# Altium PCB 安抚版大号发球机 1.6mm 双面板.PcbDoc (part 1 of 3)
Units mil, origin at the board's own origin, x right, y up, seen from the top; angles counter-clockwise.
Board outline 2637.8 x 5118.11 mil, 2 copper layers (Top Layer, Bottom Layer); 155 components, 97 nets, 435 pads, 221 vias.
Unrouted connection lines stored in the file: 1.
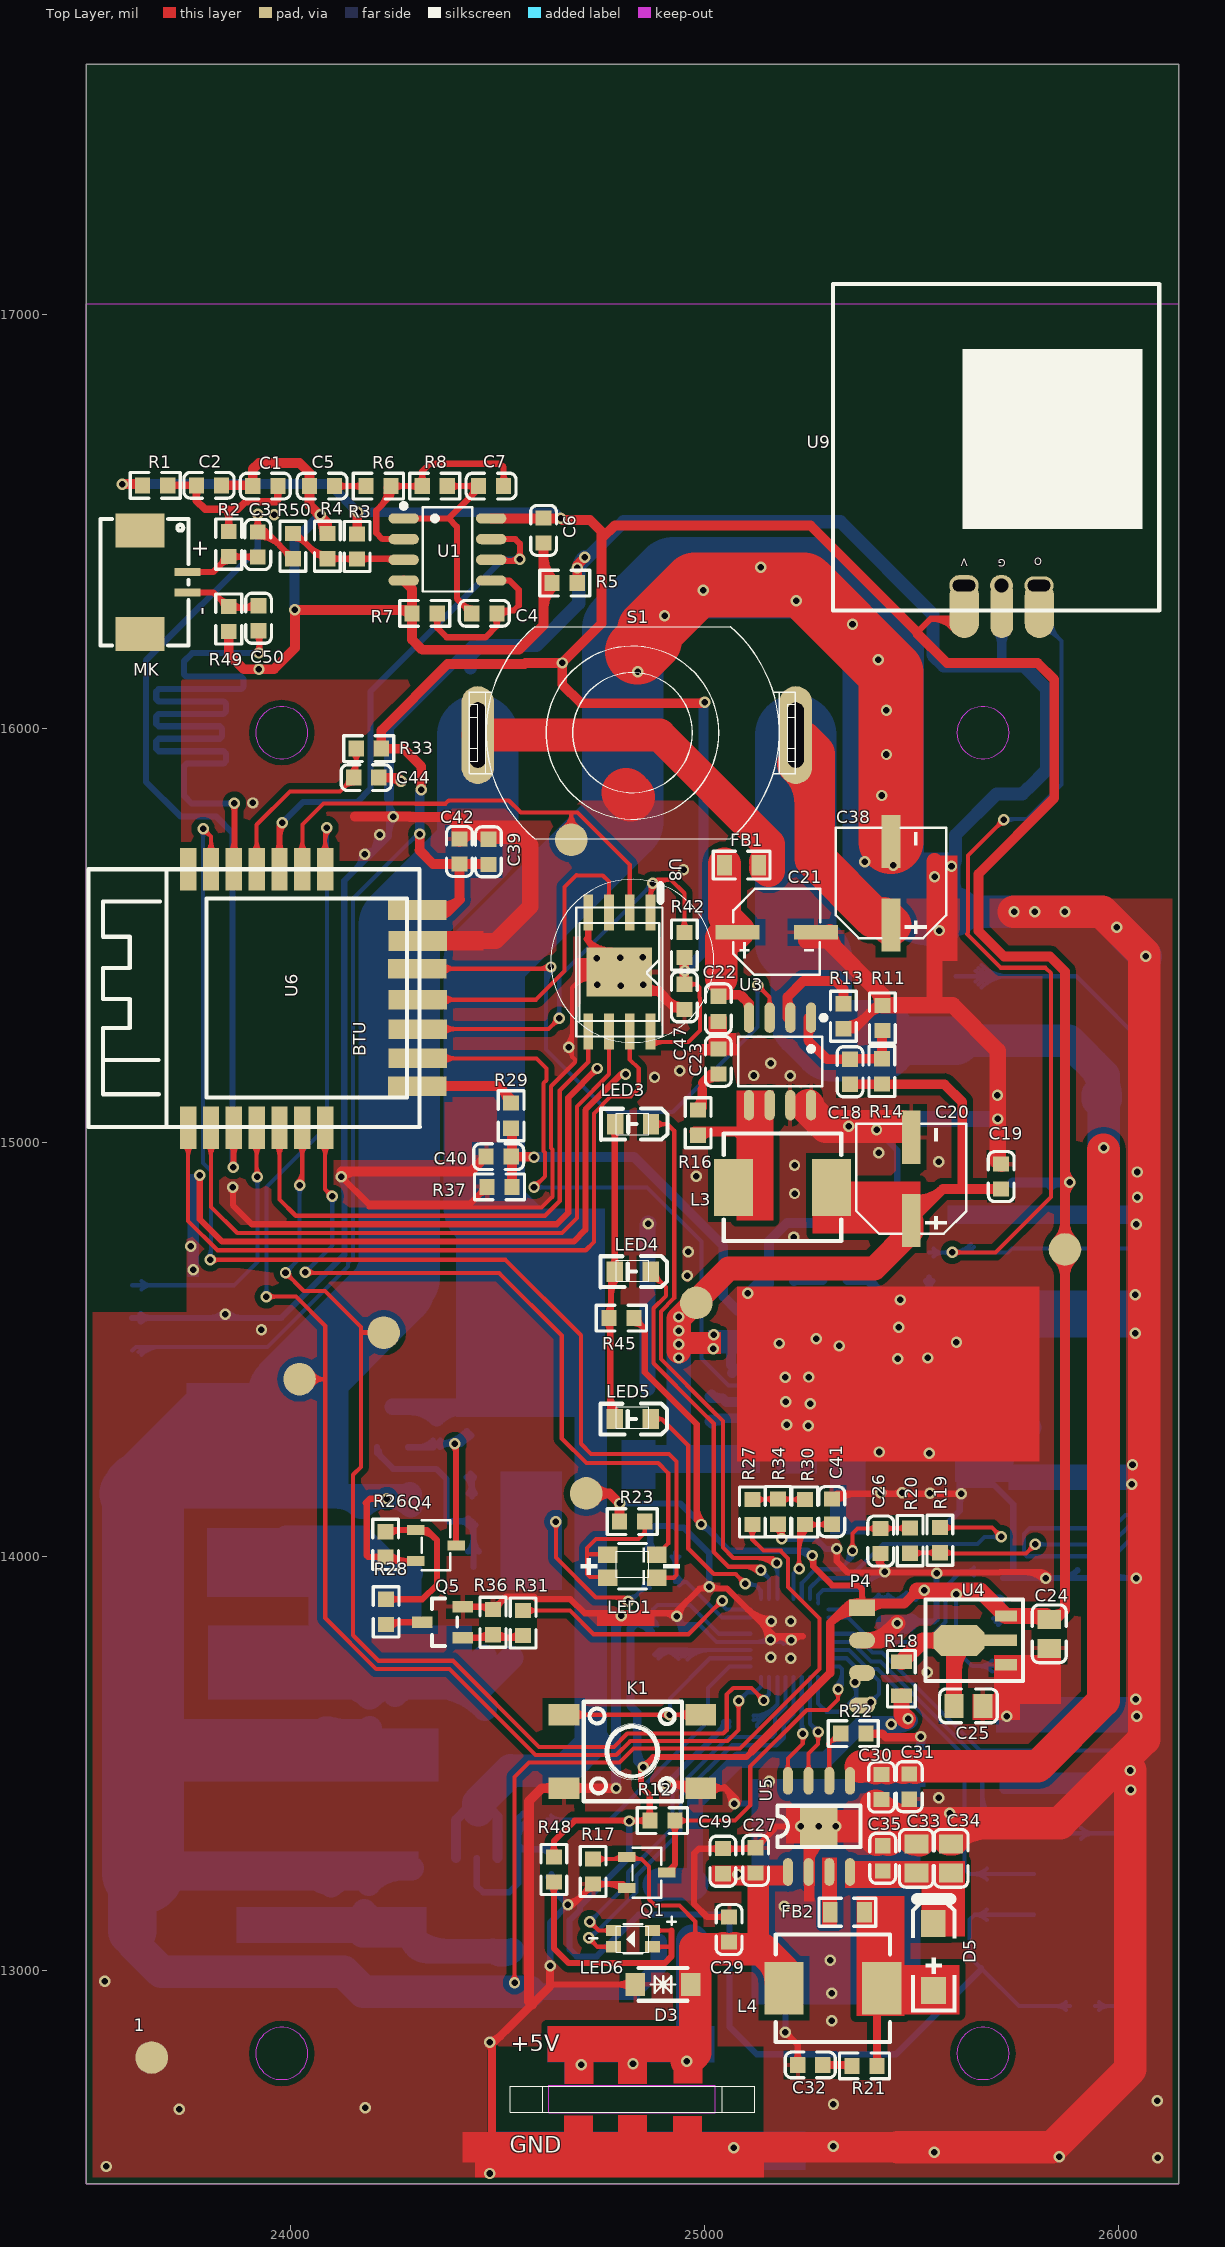
[diagram p0: Top Layer view]
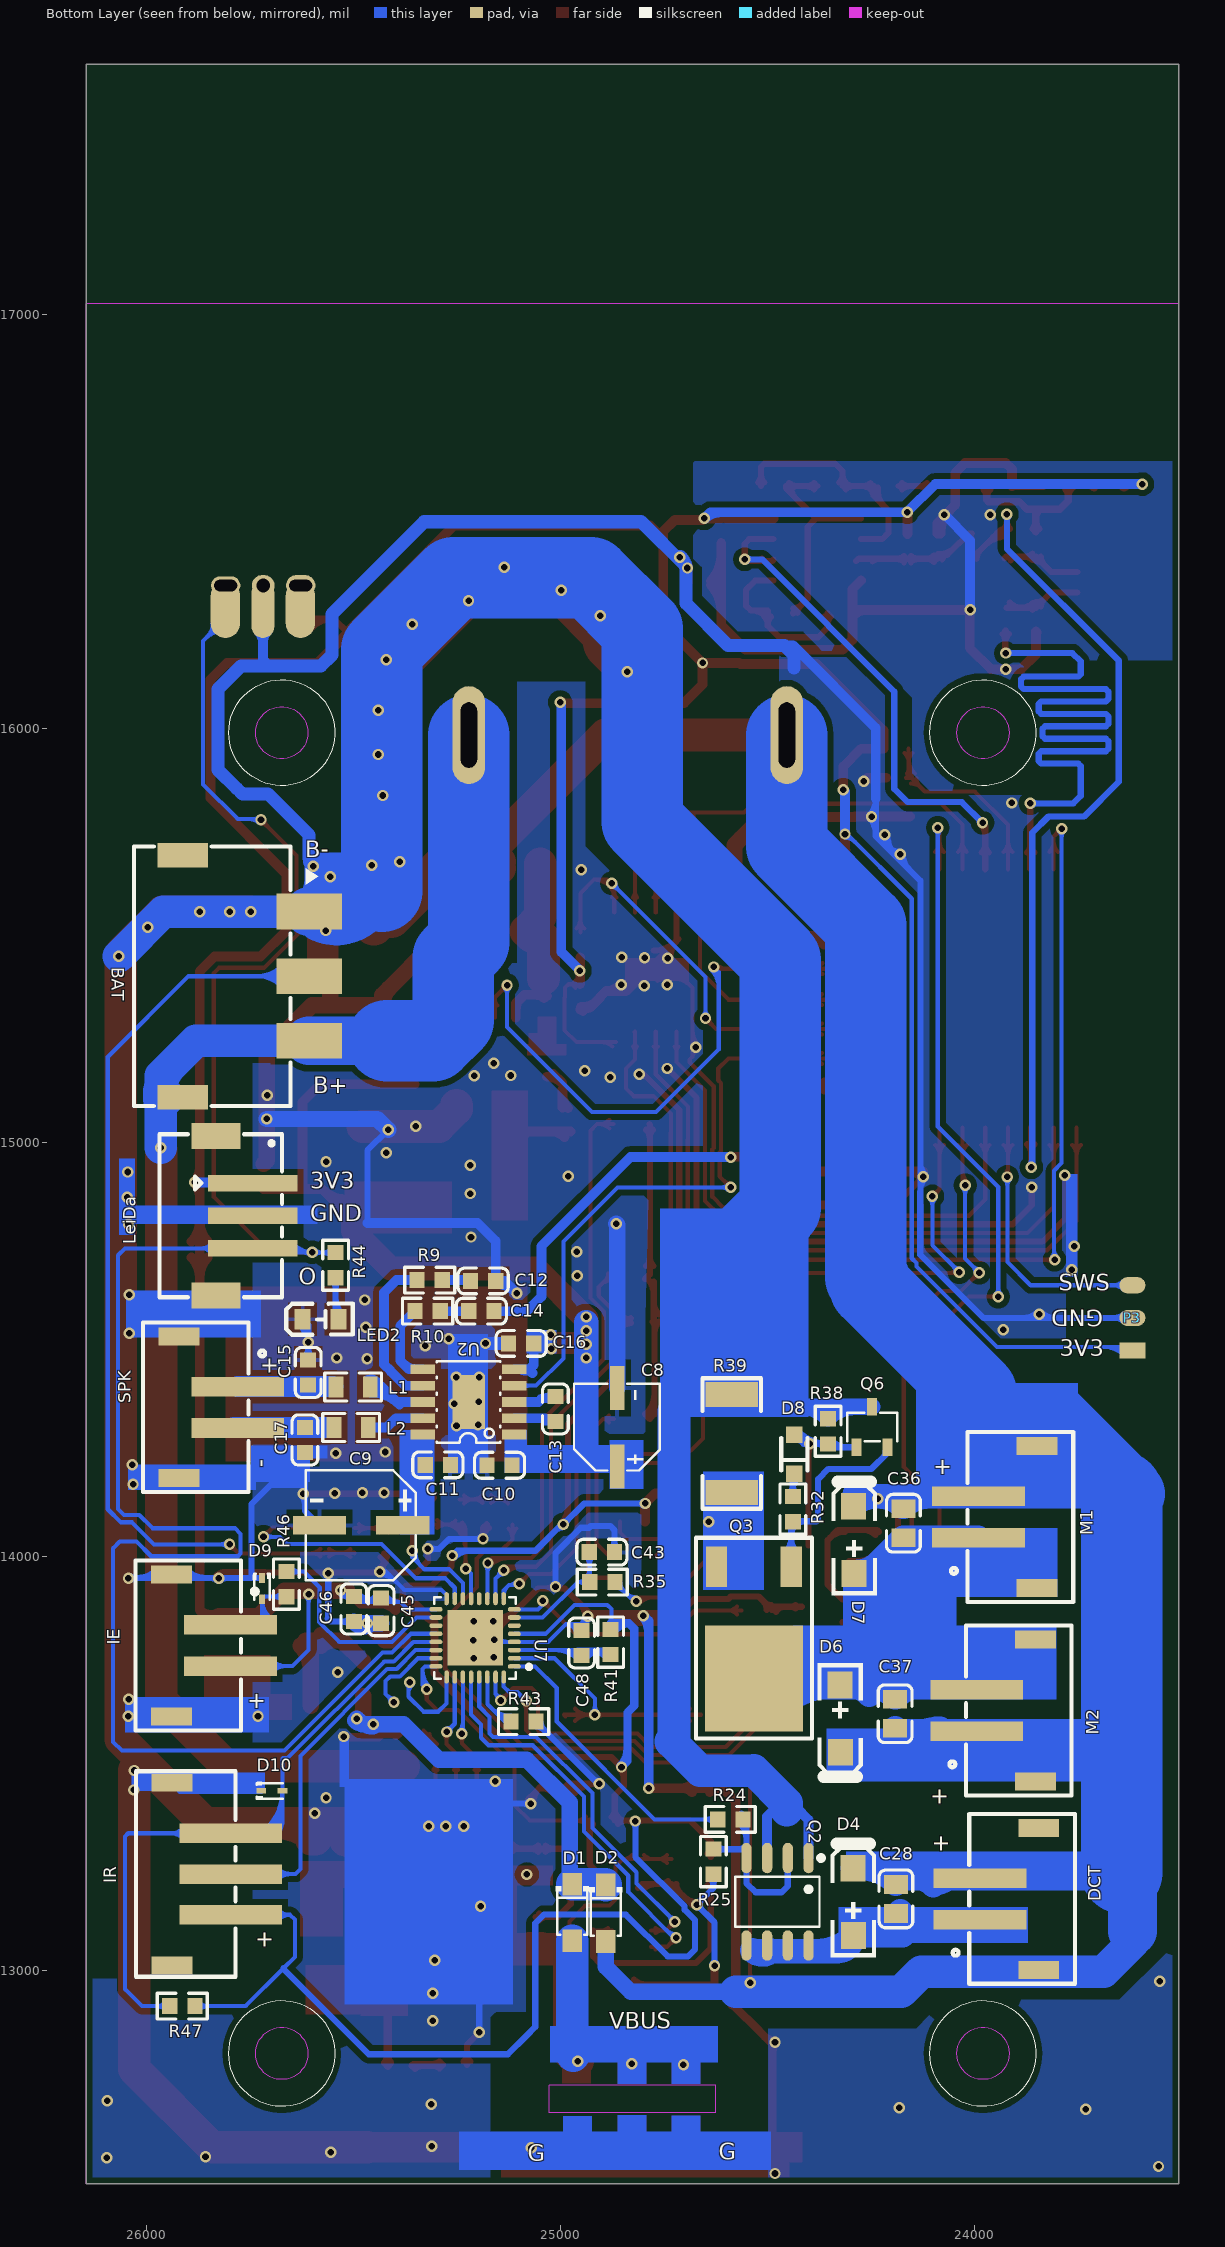
[diagram p1: Bottom Layer view, seen from below]
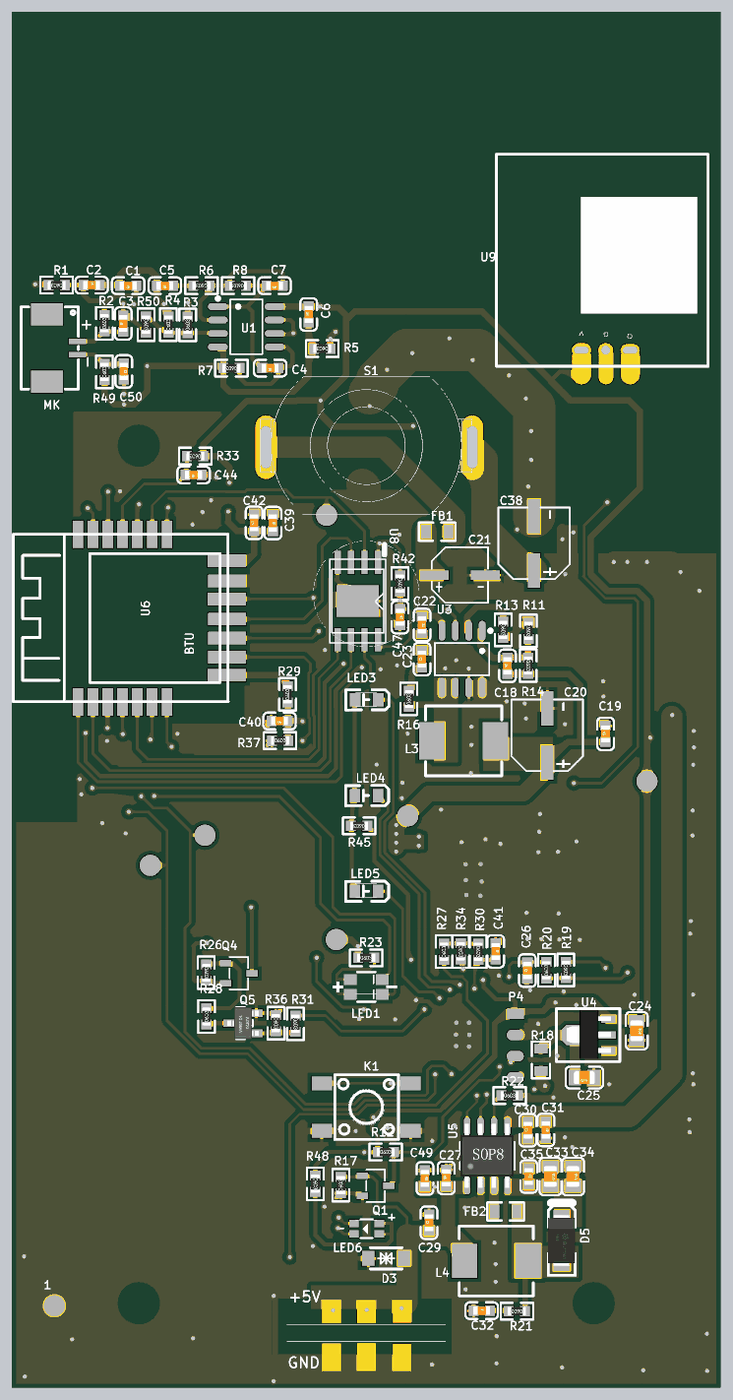
[diagram p4: 3D render of the assembled board from above, using the file's embedded part models]
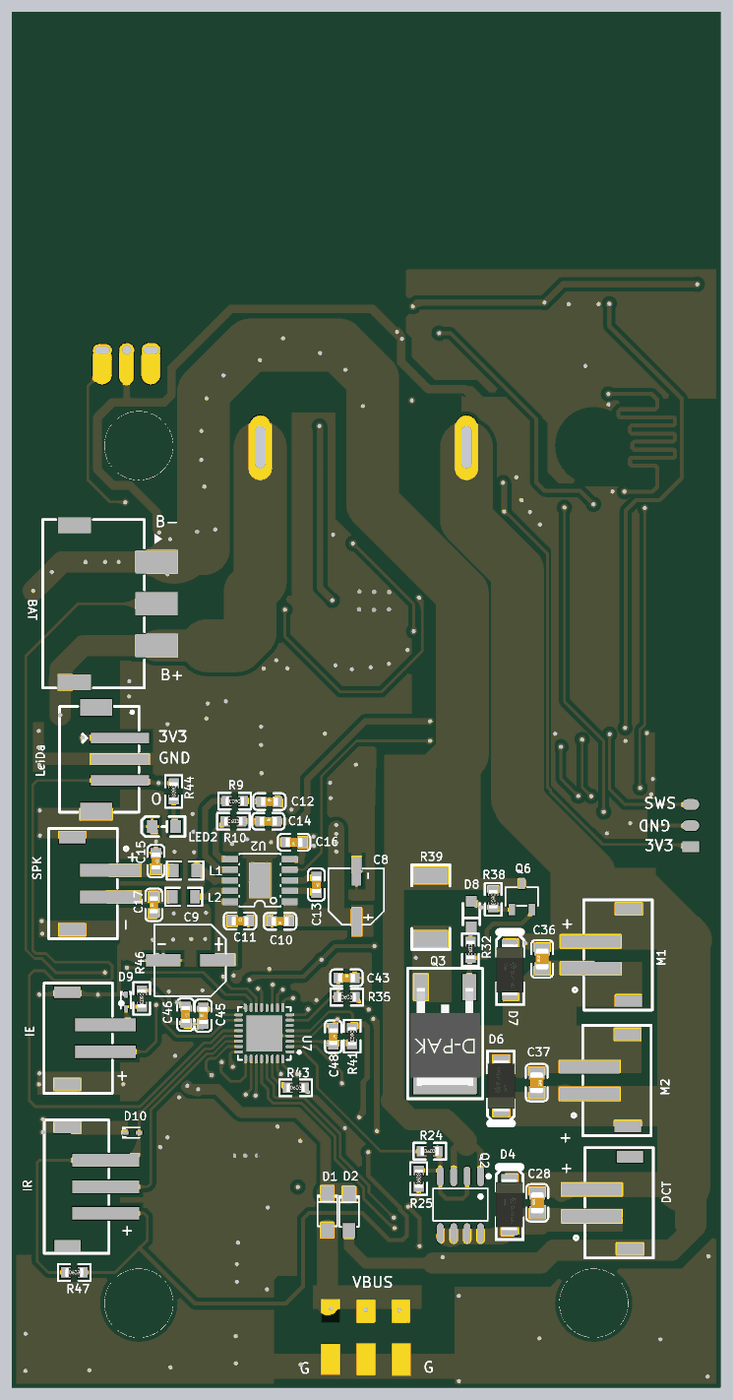
[diagram p5: 3D render of the assembled board from below, using the file's embedded part models]

## Layer stack, top to bottom
Top Solder: solder mask 0.4, Solder Resist, Dk 3.5
Top Layer: signal copper 1.4
Dielectric1: dielectric 12.6, FR-4, Dk 4.8
Bottom Layer: signal copper 1.4
Bottom Solder: solder mask 0.4, Solder Resist, Dk 3.5

## Board outline
23507.54,12485.84 23507.54,17603.96 26145.34,17603.96 26145.34,12485.84

## Design rules (kind name [scope] priority, off if disabled: settings)
Clearance [All] p1: gap=7.8 ignorepadtopadclearanceinfootprint=FALSE except(0: Arc-Hole Track-Hole SMDPad-Hole THPad-Hole Via-Hole Fill-Hole Poly-Hole Region-Hole Text-Hole)
ComponentClearance [All] p1: gap=0 collisioncheckmode=3 verticalgap=0 showdistances=FALSE
DiffPairsRouting [All] p1: maxlimit=10 minlimit=10 mostfreqgap=10 toplayer_minwidth=15 toplayer_maxwidth=15 toplayer_prefwidth=15 bottomlayer_minwidth=15 bottomlayer_maxwidth=15 bottomlayer_prefwidth=15 maxuncoupledlength=500
FabricationTestPointUsage TestPointUsage [All] p1: valid=0 allowmultiple=FALSE
FabricationTestpoint Testpoint [(IsPad And (OnTopLayer Or OnBottomLayer))] p1: side=3 testpointundercomponent=TRUE minsize=40 maxsize=100 preferedsize=60 minholesize=0 maxholesize=40 preferedholesize=32 testpointgrid=1 allowsidetop=TRUE allowsidebottom=TRUE usegrid=TRUE gridtolerance=0.01
MinimumSolderMaskSliver [All] p1: minsoldermaskwidth=4
PolygonConnect PolygonConnect_1 [All vs IsVia] p1: connectstyle=Direct reliefconductorwidth=10 reliefentries=4 polygonreliefangle="90 Angle" airgapwidth=10
PolygonConnect [All] p2: connectstyle=Relief reliefconductorwidth=10 reliefentries=4 polygonreliefangle="90 Angle" airgapwidth=10
RoutingVias [All] p1: holewidth=28 width=50 viastyle="Through Hole" minholewidth=28 minwidth=50 maxholewidth=28 maxwidth=50
SilkToSilkClearance [All] p1: silktosilkclearance=0
SilkToSolderMaskClearance SilkscreenOverComponentPads [IsPad] p1: minsilkscreentomaskgap=0 clearancetoexposedcopper=TRUE
SolderMaskExpansion [All] p1: expansion=4
Width [All] p1: maxlimit=400 minlimit=7.8 preferedwidth=10 minimp=50.000000 maximp=50.000000 favimp=50.000000
23 further rules are at their usual default settings.

## Classes and differential pairs
net class MIC: MIC_N MIC_P
component class AUDIO: C1 C2 C3 C4 C5 C6 C7 C8 C9 C10 C11 C12 C13 C14 C15 C16 C17 C50 CN1 CON1 L1 L2 MK MK1 R1 R2 R3 R4 R5 R6 R7 R8 R9 R10 R49 R50 SPK U1 U2
component class Power: BAT C18 C19 C20 C21 C22 C23 C24 C25 C26 D1 D2 D3 FB1 J1 L3 P1 P2 Q1 R11 R12 R13 R14 R16 R17 R18 R19 R20 S1 U3 U4
component class 大号发球机: *1 C23 C30 C31 C32 C33 C34 C35 C41 C42 C43 C44 C45 C46 C47 C48 D2 D5 D6 D7 D8 D9 D10 IE IR J2 J3 K1 LED1 LED2 LED3 LED4 LED5 M1 M2 MA1 MB1 MB2 P3 P4 Q2 Q3 Q4 Q5 Q6 Q7 R21 R22 R23 R24 R25 R26 R27 R28 R29 R30 R31 R32 R33 R34 R35 R36 R37 R38 R39 R41 R42 R43 R44 R45 R46 R47 R48 U5 U6 U7 U8
differential pair MIC: +MIC_P -MIC_N

## Components (designator, comment, footprint, x,y, rotation, side; value= is the part's Value field where it differs from the comment)
1 "" TP#1 23666,12791 r0 top (schematic designator TP3)
BAT "3.96-3P LT" CONN-SMD_3.96-3P-LT 25774,15387 r270 bottom (schematic designator J1)
C1 "22uf/10V" 0603_C 23940.31,16585 r180 top
C2 "100nf 16v" 0603_C 23804.31,16587 r0 top
C3 "10uf/10V" 0603_C 23922,16444 r90 top
C4 "1uf/10V" 0603_C 24469,16278 r180 top
C5 "10uf/10V" 0603_C 24077.31,16585 r180 top
C6 "100nf 16v" 0603_C 24612,16478 r90 top
C7 "51PF/16v" 0603_C 24485.31,16585 r180 top
C8 "100uf 16V" CAP-SMD_5*5.4 24863,14313 r90 bottom
C9 "220uf/10v" "SMD 6.3*7.7" 25481,14081 r180 bottom
C10 "10uf/10V" 0603_C 25147,14221 r0 bottom
C11 "10uf/10V" 0603_C 25296,14222 r180 bottom
C12 "100nf" 0603_C 25186.69,14666 r180 bottom
C13 "4.7uf/10V" 0603_C 25012,14357 r270 bottom
C14 "100nf" 0603_C 25191,14593 r180 bottom
C15 "1nF" 0603_c 25609,14445 r270 bottom
C16 "1uf/10V" 0603_C 25095,14515 r0 bottom
C17 "1nF" 0603_c 25617,14282 r90 bottom
C18 "1nf 16v" 0603_C 25352,15171 r90 top (schematic designator C24)
C19 "100nf 16v" 0603_C 25717,14918 r90 top (schematic designator C25)
C20 "220uf/10v" "SMD 6.3*7.7" 25505,14912 r270 top (schematic designator C26)
C21 "100uf/16v 5X5.4" CAP-SMD_5*5.4 25175,15508 r0 top
C22 "100nf 16v" 0603_C 25034,15323 r270 top
C23 "2.2nf 16v" 0603_c 25034,15196 r90 top (schematic designator C29)
C24 "1nf 16v" 0805_C 25833,13814 r270 top
C25 "22UF" 0805_C 25638,13640 r180 top
C26 "100nF" 0603_C 25426,14038 r90 top
C27 "1UF 25V" 0603_C 25124,13267 r90 top (schematic designator C28)
C28 "0.1uf/25v" 0805_C 24190,13174 r90 bottom
C29 "10UF" 0603_c 25060,13100 r90 top
C30 "1UF 16V" 0603_c 25428,13444 r90 top
C31 "10UF 16V" 0603_c 25495,13445 r270 top (schematic designator C36)
C32 "1000P" 0603_C 25256,12773 r0 top (schematic designator C37)
C33 "22UF 25V" 0805_C 25512,13272 r270 top (schematic designator C38)
C34 "22UF 25V" 0805_C 25596,13272 r270 top (schematic designator C39)
C35 "1UF 25V" 0603_C 25431,13272 r270 top (schematic designator C40)
C36 "0.1uf/25v" 0805_C 24172,14081 r90 bottom
C37 "0.1uf/25v" 0805_C 24192,13621 r270 bottom
C38 "220uf/25v" "SMD 6.3*7.7" 25456,15626 r270 top
C39 "10uf" 0603_c 24479,15702 r270 top
C40 "1nF" 0603_C 24503.68,14966 r180 top
C41 "100nF" 0603_C 25308,14109 r270 top
C42 "0.1uf/25v" 0603_C 24409,15703 r90 top
C43 "100NF/50V" 0603_C 24900,14011 r180 bottom
C44 "100nF" 0603_C 24184,15881 r180 top
C45 "10uf" 0603_c 25433,13870 r90 bottom
C46 "0.1uf/25v" 0603_C 25499,13874 r270 bottom
C47 "0.1uf/25v" 0603_C 24952,15352 r270 top
C48 "100nF" 0603_C 24949,13792 r270 bottom
C49 "10UF 25V" 0603_c 25045,13265 r270 top
C50 "10uf/10V" 0603_C 23924,16266 r270 top
D1 "DSK24" SOD-123FL 24965,13135 r270 bottom
D2 "DSK24" SOD-123FL 24884,13133 r270 bottom
D3 "SMF6.0CA" "SOD-123 双向" 24907,12965 r0 top (schematic designator D4)
D4 "SS24" SMA 24290,13143 r270 bottom
D5 "SS54" SMA 25557,13010 r270 top (schematic designator D6)
D6 "SS54" SMA 24328,13633 r90 bottom
D7 "SS54" SMA 24288,14017 r270 bottom
D8 "1N5819WS" SOD-323 24484,14231 r90 bottom
D9 "LESD5Z5.0CT1G" SOD-523_L1.2-W0.8-LS1.6-RD 25721,13923 r270 bottom
D10 "LESD5Z5.0CT1G" SOD-523_L1.2-W0.8-LS1.6-RD 25697,13435 r180 bottom
DCT "2.54-2P LT" CONN-SMD_2.54-2PLT 23916,13174 r90 bottom (schematic designator MB1)
FB1 "100R/100M" 0805_R 25101,15669 r180 top
FB2 "100R/100M" 0805_R 25356,13141 r180 top
IE "2.54-2P LT" CONN-SMD_2.54-2PLT 25868,13786 r270 bottom (schematic designator J3)
IR "2.54-3P LT" CONN-SMD_2.54-3P-LT 25867,13234 r270 bottom (schematic designator J4)
K1 "C42416254" KEY_SMD_4P 24828,13530 r180 top
L1 "1K 0.5A" 0805_R 25511,14411 r180 bottom
L2 "1K 0.5A" 0805_R 25516,14313 r180 bottom
L3 "33uh 0650" IND-SMD_L7.7-W6.6_APS0650 25189,14892 r0 top
L4 "0630-2R2" "L 6.6*7.0" 25314,12961 r0 top
LED1 "bl-hb5gk33b-trb" LED-SMD_4P-L3.2-W2.7-P1.40-TL_BL-HB5GK33B-TRB 24825,13981 r0 top
LED2 "LED_LeiDa" 0805_LED 25555,14569 r180 bottom
LED3 "C7371911" 0805_LED 24804,15049 r180 top
LED4 "C7371911" 0805_LED 24803,14693 r180 top
LED5 "C7371911" 0805_LED 24803,14337 r180 top
LED6 "C5221230" LED-SMD_4P-L3.2-W1.6-TL_XL-3216SURUGC 24828,13078 r0 top
LeiDa "2.0-3P LT" CONN-SMD_2.0-3PLT 25846,14770 r90 bottom (schematic designator J2)
M1 "2.54-2P LT" CONN-SMD_2.54-2PLT 23920,14096 r90 bottom (schematic designator MA1)
M2 "2.54-2P LT" CONN-SMD_2.54-2PLT 23924,13629 r90 bottom (schematic designator MA2)
MK "" CONN-SMD_1.25-2PWT 23695,16353 r90 top (schematic designator MK1)
P3 "" "4P 2.0"#1 23616,14611 r270 bottom
P4 "" "4P 2.0"#2 25378,13764 r90 top
Q1 "2N7002" SOT-23 24841,13229 r180 top
Q2 "AP9926" SOP8 24476,13167 r0 bottom
Q3 "SM3113NSUC-VB" TO-252 24533,13841 r90 bottom
Q4 "S8550" SOT-23 24332,14019 r180 top
Q5 "S8050" SOT-23(SOT-23-3) 24368,13842 r0 top
Q6 "S8550" SOT-23 24239,14293 r270 bottom
R1 "10R" 0603_R 23674.31,16587 r180 top
R2 "2.2k" 0603_R 23852,16445 r90 top
R3 "56k" 0603_R 24162,16439 r90 top
R4 "56k" 0603_R 24090,16440 r90 top
R5 "0R" 0603_R 24663,16351 r180 top
R6 "100R" 0603_R 24213.31,16585 r180 top
R7 "13k" 0603_R 24325,16278 r180 top
R8 "2.7K" 0603_R 24349.31,16585 r180 top
R9 "27K" 0603_R 25315.69,14668 r0 bottom
R10 "27K" 0603_R 25320.69,14593 r180 bottom
R11 "32.4k" 0603_R 25430,15301 r270 top
R12 "10k" 0603_R 24899,13363 r0 top
R13 "NC/30k" 0603_R 25336,15305 r270 top (schematic designator R18)
R14 "100k" 0603_r 25429,15172 r270 top
R16 "2R" 0603_R 24985,15048 r90 top
R17 "100k" 0603_r 24732,13240 r90 top
R18 "2R" 0805_R 25477,13716 r270 top
R19 "5.1K" 0603_R 25569,14040 r270 top
R20 "1K" 0603_R 25497,14039 r90 top
R21 "1K" 0603_R 25387,12771 r180 top
R22 "1K" 0603_R 25360,13573 r0 top
R23 "1K" 0603_R 24826,14085 r0 top
R24 "10R" 0603_R 24590,13366 r180 bottom
R25 "10K" 0603_R 24631,13264 r90 bottom
R26 "10k" 0603_R 24231,14030 r270 top
R27 "470K" 0603_R 25116,14108 r90 top
R28 "1k" 0603_R 24232,13867 r90 top
R29 "0R" 0603_R 24533.68,15065 r90 top
R30 "10K" 0603_R 25243,14108 r270 top
R31 "1k" 0603_R 24563,13840 r270 top
R32 "51R" 0603_R 24439,14115 r90 bottom
R33 "10K" 0603_R 24190,15951 r180 top
R34 "100K" 0603_R 25178,14109 r270 top
R35 "1K" 0603_R 24899,13939 r180 bottom
R36 "10k" 0603_R 24490,13842 r270 top
R37 "10K" 0603_R 24505.68,14893 r0 top
R38 "1K" 0603_R 24354,14303 r270 bottom
R39 "R010" 2512_R 24551,14267 r180 bottom
R41 "100k" 0603_R 24879,13794 r270 bottom
R42 "10K" 0603_R 24952,15477 r270 top
R43 "10k" 0603_R 25089,13602 r180 bottom
R44 "10K" 0603_R 25543,14704 r270 bottom
R45 "1k" 0603_r 24800,14576 r180 top
R46 "3.3K" 0603_R 25662,13934 r270 bottom
R47 "10K" 0603_R 25913,12915 r180 bottom
R48 "1K" 0603_R 24637,13245 r270 top
R49 "2.2k" 0603_R 23852,16264 r90 top
R50 "10R" 0603_R 24007,16440 r270 top
S1 "*" 大按键 24690,16049 r180 top
SPK "2.54-2P LT" CONN-SMD_2.54-2PLT 25850,14361 r270 bottom (schematic designator CON1)
TP1 "" TP#2 24679,15731 r0 top
TP2 "" TP#2 24715,14153 r0 top
TP3 "" TP#2 24023,14429 r0 top
TP4 "" TP#2 24226,14541 r0 top
TP4 "" TP#2 24981,14613 r0 top
TP4 "" TP#2 25871,14742 r0 top
U1 "lmv358b-sr" SOP8 24380,16432 r270 top
U2 "CST8336" ESOP-10 25239,14465 r90 bottom
U3 "tmi3493" SOP8 25183,15196 r180 top (schematic designator U4)
U4 "me6210a30pg" SOT-89 25483,13812 r0 top
U5 "HE5090EA" SOP8-9 25277,13349 r0 top
U6 "BTU" BTU 24458,15034 r90 top locked
U7 "PY32F040K1BU6" QFN-32_L5.0-W5.0-P0.50-BL-EP3.4 25201,13816 r90 bottom
U8 "W25NO1GVZE1G" SOP8-150+208 24795,15412 r270 top
U9 "LeiDa" 5.8G 25815,16649 r180 top

## Footprints (in the part's own frame and the unit in brackets; to place one, negate y for a bottom-side part, rotate by r counter-clockwise, add the part's x,y. Pads: shape width x height; smd on the part's side, far side on the other; paste and mask are expansions set on the pad)
"4P 2.0"#1 [mm]
  rect 1x1.6 smd: 1(2.87,-0.076)
  oval 1x1.6 smd: 2(0.87,-0.076) 3(-1.13,-0.076)
"4P 2.0"#2 [mm]
  rect 1x1.6 smd: 1(2.87,-0.076)
  oval 1x1.6 smd: 2(0.87,-0.076) 3(-1.13,-0.076) 4(-3.13,-0.076)
5.8G [mm]
  oval 1.8x3.5 all layers, no hole: 1(4.752,9.195) 3(0.152,9.195)
  oval 1.8x1.3 hole 0.7 slot 1.4 at 0 deg: 1(4.771,7.722)
  oval 1.4x3.5 all layers, no hole: 2(2.452,9.195)
  oval 1.4x1.3 hole 0.85: 2(2.471,7.722)
  oval 1.8x1.118 hole 0.7 slot 1.4 at 0 deg: 3(0.171,7.722)
  silkscreen extent -7.21,-10.77 12.81,9.25, body extent 0.2,7.47 4.72,9.44, height 5.5
0603_C [mm]
  rect 0.93x0.98 smd: 1(-0.77,0) 2(0.77,0)
  silkscreen extent -1.54,-0.79 1.54,0.79, body extent -0.8,-0.4 0.8,0.4, height 0.3
0603_c [mm]
  rect 0.93x0.98 smd: 1(-0.77,0) 2(0.77,0)
  silkscreen extent -1.54,-0.79 1.54,0.79, body extent -0.8,-0.4 0.8,0.4, height 0.3
0603_R [mm]
  rect 0.93x0.98 smd: 1(-0.77,0) 2(0.77,0)
  silkscreen extent -1.53,-0.79 1.54,0.79, body extent -0.85,-0.4 0.85,0.4, height 0.56
0603_r [mm]
  rect 0.93x0.98 smd: 1(-0.77,0) 2(0.77,0)
  silkscreen extent -1.53,-0.79 1.54,0.79, body extent -0.85,-0.4 0.85,0.4, height 0.56
0805_C [mm]
  rect 1.16x1.47 smd: 1(-0.89,0) 2(0.89,0)
  silkscreen extent -1.77,-1.04 1.77,1.04, body extent -1,-0.62 1,0.63, height 0.77
0805_LED [mm]
  rect 1x1.25 smd: 1(0.482,0.112) 2(-1.718,0.112)
  silkscreen extent -2.72,-0.84 1.36,1.07
0805_R [mm]
  rect 0.9x1.27 smd: 1(1.318,-0.024) 2(-0.782,-0.024)
  silkscreen extent -1.47,-0.88 2,0.83
2512_R [mil]
  rect 125.98x60 smd: 1(-35.33,124.72) 2(-35.33,-111.5)
  silkscreen extent -106,-151 36,164
BTU [mm]
  rect 2.6x1 smd: 1(0.051,17.882) 2(0.051,16.482) 3(0.051,15.082) 4(0.049,13.68) 5(0.051,12.282) 6(0.051,10.882) 7(0.051,9.482) 15(15.9,9.48) 16(15.9,10.88) 17(15.9,12.28) 18(15.9,13.68) 19(15.9,15.08) 20(15.9,16.48) 21(15.9,17.88)
  rect 1.2x3.6 smd: 8(2.602,3.834) 9(4.3,3.8) 10(6.1,3.8) 11(7.9,3.8) 12(9.802,3.834) 13(11.5,3.8) 14(13.402,3.834)
  silkscreen extent 0.1,3.68 15.9,24
CAP-SMD_5*5.4 [mm]
  rect 2.7x0.91 smd: 1(-2.4,0) 2(2.4,0)
  silkscreen extent -2.66,-2.62 2.66,2.65
CONN-SMD_1.25-2PWT [mm]
  rect 0.5x1.6 smd: 1(0.625,-1.45) 2(-0.625,-1.45)
  rect 2.1x3 smd: 3(3.175,1.45) 4(-3.175,1.45)
  silkscreen extent -3.87,-1.52 3.88,3.88
CONN-SMD_2.0-3PLT [mm]
  rect 1x5.5 smd: 1(3.357,-2.609) 2(1.357,-2.609) 3(-0.643,-2.609)
  rect 1.6x3 smd: 4(-3.543,-0.359) 5(6.256,-0.359)
  silkscreen extent -3.64,-4.41 6.36,3.09
CONN-SMD_2.54-2PLT [mm]
  rect 1.2x5.7 smd: 1(-1.27,1.8) 2(1.27,1.8)
  rect 1.1x2.5 smd: 3(-4.35,-1.8) 4(4.35,-1.8)
  silkscreen extent -5.21,-4.01 5.21,3.48
CONN-SMD_2.54-3P-LT [mm]
  rect 1.2x6.3 smd: 1(-2.5,1.8) 2(0,1.8) 3(2.5,1.8)
  rect 1.1x2.5 smd: 4(5.6,-1.8) 5(-5.6,-1.8)
  silkscreen extent -6.3,-4 6.3,2.1
CONN-SMD_3.96-3P-LT [mm]
  rect 2.2x4 smd paste+0 mask+0.05: 1(-4.334,4.248) 2(-0.374,4.248) 3(3.586,4.248)
  rect 1.5x3.1 smd paste+0 mask+0.05: 4(7.035,-3.502) 5(-7.784,-3.502)
  silkscreen extent -8.32,-6.5 7.58,4.79
ESOP-10 [mm]
  rect 0.6x1.5 smd paste+0 mask+0.05: 1(-4.316,-3.238) 2(-3.316,-3.238) 3(-2.316,-3.238) 4(-1.316,-3.238) 5(-0.316,-3.238) 6(-0.316,2.362) 7(-1.316,2.362) 8(-2.316,2.362) 9(-3.316,2.362) 10(-4.316,2.362)
  rect 3.3x2 smd paste+0 mask+0.05: 11(-2.316,-0.438)
  silkscreen extent -4.82,-2.39 0.18,1.51
IND-SMD_L7.7-W6.6_APS0650 [mm]
  rect 2.4x3.5 smd: 1(-3,0) 2(3,0)
  silkscreen extent -3.6,-3.3 3.6,3.3
KEY_SMD_4P [mm]
  rect 1.9x1.3 smd: 1(-4.155,2.252) 2(4.244,2.252) 3(-4.155,-2.247) 4(4.244,-2.247)
  silkscreen extent -3.01,-3.05 3.02,3.05
"L 6.6*7.0" [mm]
  rect 2.4x3.2 smd: 1(-3.093,-0.069) 2(2.907,-0.069)
  silkscreen extent -3.59,-3.37 3.41,3.23
LED-SMD_4P-L3.2-W1.6-TL_XL-3216SURUGC [mm]
  rect 0.9x0.7 smd: 1(-1.2,0.5) 2(1.2,0.5) 3(-1.2,-0.5) 4(1.2,-0.5)
  silkscreen extent -2.69,-0.89 2.61,1.35
LED-SMD_4P-L3.2-W2.7-P1.40-TL_BL-HB5GK33B-TRB [mm]
  rect 1.2x1 smd paste+0 mask+0.05: 1(1.54,-0.802) 2(1.54,0.598) 3(-1.46,-0.802) 4(-1.46,0.598)
  silkscreen extent -3.14,-1.5 2.95,1.3
QFN-32_L5.0-W5.0-P0.50-BL-EP3.4 [mm]
  oval 0.28x0.8 smd paste+0 mask+0.05: 1(-2.049,-2.273) 2(-1.549,-2.273) 3(-1.049,-2.273) 4(-0.549,-2.273) 5(-0.049,-2.273) 6(0.451,-2.273) 7(0.951,-2.273) 8(1.451,-2.273) 17(1.451,2.527) 18(0.951,2.527) 19(0.451,2.527) 20(-0.049,2.527) 21(-0.549,2.527) 22(-1.049,2.527) 23(-1.549,2.527) 24(-2.049,2.527)
  oval 0.8x0.28 smd paste+0 mask+0.05: 9(2.101,-1.623) 10(2.101,-1.123) 11(2.101,-0.623) 12(2.101,-0.123) 13(2.101,0.377) 14(2.101,0.877) 15(2.101,1.377) 16(2.101,1.877) 25(-2.699,1.877) 26(-2.699,1.377) 27(-2.699,0.877) 28(-2.699,0.377) 29(-2.699,-0.123) 30(-2.699,-0.623) 31(-2.699,-1.123) 32(-2.699,-1.623)
  rect 3.4x3.4 smd paste+0 mask+0.05: 33(-0.299,0.127)
  silkscreen extent -2.8,-3.3 2.2,2.63
SMA [mm]
  rect 1.65x1.53 smd: 1(1.449,-0.076) 2(-2.665,-0.102)
  silkscreen extent -4.16,-1.47 2.8,1.32, body extent -3.06,-1.39 1.84,1.18, height 2.39
"SMD 6.3*7.7" [mm]
  rect 3.26x1.15 smd: 1(2.549,-0.129) 2(-2.561,-0.129)
  silkscreen extent -3.4,-3.51 3.36,3.25
"SOD-123 双向" [mm]
  rect 1.2x1.4 smd: 1(-1.864,0.06) 2(1.536,0.06)
  silkscreen extent -1.66,-0.94 1.34,1.06
SOD-123FL [mm]
  rect 1.4x1.2 smd: 1(1.579,-0.166) 2(-1.891,-0.166)
  silkscreen extent -1.76,-1.17 1.22,0.84
SOD-323 [mm]
  rect 1x1 smd: 1(1.625,-1.235) 2(-0.774,-1.235)
  silkscreen extent -0.57,-2.03 1.43,-0.44
SOD-523_L1.2-W0.8-LS1.6-RD [mm]
  rect 0.6x0.36 smd: 1(-0.65,0) 2(0.65,0)
  silkscreen extent -0.91,-0.55 0.68,0.55
SOP8 [mm]
  oval 0.63x1.865 smd: 1(-1.905,-2.682) 2(-0.635,-2.682) 3(0.635,-2.682) 4(1.905,-2.682) 5(1.905,2.682) 6(0.635,2.682) 7(-0.635,2.682) 8(-1.905,2.682)
  silkscreen extent -2.82,-2.83 2.58,1.52
SOP8-9 [mil]
  oval 24x66.93 smd: 1(-75,-110) 2(-25,-110) 3(25,-110) 4(75,-110) 5(75,110) 6(25,110) 7(-25,110) 8(-75,110)
  rect 90.55x90.55 smd: 9(0,0)
  silkscreen extent -100,-50 100,50, body extent -100,-119 98,119, height 63
SOP8-150+208 [mm]
  rect 2.2x0.6 smd: 1(-3.65,1.905) 2(-3.65,0.635) 3(-3.65,-0.635) 4(-3.65,-1.905) 5(3.65,-1.905) 6(3.65,-0.635) 7(3.65,0.635) 8(3.65,1.905)
  rect 3x4 smd: 9(0,0)
  silkscreen extent -5.32,-2.64 3.95,2.64
SOT-23 [mm]
  rect 1.07x0.6 smd: 1(0.719,-1.166) 2(0.719,0.734) 3(-1.751,-0.216)
  silkscreen extent -1.39,-1.75 0.36,1.32
SOT-23(SOT-23-3) [mm]
  rect 1.25x0.7 smd: 1(1.25,-0.95) 2(1.25,0.95) 3(-1.25,0)
  silkscreen extent -0.65,-1.46 0.9,1.46, body extent -1.5,-1.5 1.5,1.5, height 1.3
SOT-89 [mm]
  rect 1.35x0.7 smd: 1(6.223,-1.854) 3(6.223,1.146)
  oct 3.15x1.9 smd: 2(3.358,-0.354)
  rect 2.2x0.7 smd: 2(5.817,-0.356)
  silkscreen extent 1.29,-2.85 7.29,2.15, body extent 2.28,-2.62 6.48,1.98, height 1.55
TO-252 [mm]
  rect 2.5x1.3 smd: 1(3.429,-2.286) 3(3.429,2.286)
  rect 6.5x6 smd: 2(-3.429,0)
  silkscreen extent -7.11,-3.56 5.21,3.56, body extent -5.92,-3.3 3.33,3.3, height 2.31
TP#1 [mm]
  round 2 smd: ""(0,0)
TP#2 [mm]
  round 2 smd: 1(0,0)
大按键 [mm]
  oval 2x6 hole 1 slot 4 at 90 deg: 1(-13.49,1.651) 2(6.01,1.651)
  silkscreen extent -13.49,-4.99 6.51,8.01

## Part data
1 TP1 TP2 TP3 TP4 TP4 TP4: library part J-CSD
BAT IR LeiDa: library part BX-PH2.0-3PZZ
C1 C2 C3 C4 C5 C6 C7 C10 C11 C12 C13 C14 C16 C22 C27 C28 C30 C31 C32 C36 C37 C42 C46 C47 C50: library part Cap, "Capacitor"
C8 C9 C21 C33 C38: library part RVT1A221M0605_C72494
C15 C17: library part CAP_0805
C18 C19 C20 C23 C24 C25 C26 C29 C35 C40 C41 C44 C48 C49: library part CAP
C34 C39 C45: library part C-0603, "C-?-K-0603"
C43: library part Cap1, "无极电容"
D1 D2: library part "Diode 1N4148", "High Conductance Fast Diode"
D3 D4 D5 D6 D7: library part D-SS24-SMA, "DO214AC"
D8: library part DIODE
DCT IE M1 M2: library part BX-PH2.0-2PZZ
FB1 R1 R2 R3 R4 R5 R6 R7 R8 R9 R10 R11 R12 R14 R16 R23 R25 R27 R29 R30 R32 R33 R34 R37 R38 R42 R44 R45 R46 R47 R48 R49 R50: library part RES
FB2 R21 R22 R24 R26 R28 R31 R35 R36 R39 R41 R43: library part Res2, "Resistor"
K1: library part TS-1002S-05026C
L1 L2: library part SBK201209T-102Y-N
L3: library part yspi0518s-100m
L4: library part FXL0630-4R7-M
LED2: library part XL-2012SURC
LED3 LED4 LED5: library part LED0, "Typical INFRARED GaAs LED"
LED6: library part TZ-LAMP03RG4HD-A
MK SPK: library part HC-1.25-2PLT
P3 P4: library part "Header 4", "Header, 4-Pin"
Q1: library part JMTL3400A
Q2: library part WSP9936
Q3: library part NMOS1, "N沟道MOS管"
Q4 Q6: library part S8550_C545533
Q5: library part NPN_sot23, "NPN三极管"
R13 R17 R18 R19 R20: library part Res1, "贴片电阻"
S1: library part TS-3625SP-2P
U3: library part me6210a30pg
U8: library part 24C08_3
U9: library part CON3

## Via types
v1: diameter 27.56, hole 15.75, Top Layer to Bottom Layer, tented both sides, 221 vias

## Nets (pads, with @x,y where several pads share a name; then routed paths per layer and width w, separated by ;. In a path a pad name is that pad's centre, name@x,y a point inside that pad or via, vN(x,y) a via of type N, cw(c..) or ccw(c..) an arc to the next point about the centre after c; other vN are vias at no path point)
3V3: C6.2 C24.1 C39.2 C42.1 C45.2 C46.1 C47.1 IE.2 IR.3 LeiDa.1 P3.1 P4.1 R1.2 R3.2 R12.1 R23.1 R33.1 R41.1 R42.2 R45.1 R47.2 R48.1 TP2.1 TP4.1@25871,14742 U1.8 U4.3 U6.14 U7.5 U7.17 U8.8 U9.1 | length 19545.7
  Top Layer w10: U8.8@24866,15242.68 24961.68,15242.68 24990,15271 24990,15349 24988.63,15350.37 24988.63,15374.37 24980.68,15382.32 ; U8.8@24874.82,15231.99 cw(c24900.64,15206.16) 24900.64,15242.68 ; C47.1@24952,15382.32 24980.68,15382.32 ; C47.1@24963.37,15374 cw(c24980.68,15360.14) 24980.68,15382.32 ; C47.1@24963.37,15390.63 ccw(c24980.68,15404.49) 24980.68,15382.32
  Top Layer w15: R48.1@24629.36,13282.96 ccw(c24610.91,13301.4) 24637,13301.4 ccw(c24663.09,13301.4) R48.1@24644.64,13282.96 ; R48.1@24637,13275.31 24637,13313 24687,13363 R12.1@24868.69,13363 24868.69,13424.31 24847,13446 24847,13486.7 v1(24852.65,13492.35) 24876.8,13516.5 25101.5,13516.5 25115.5,13530.5 ; 24801.43,13363 cw(c24801.43,13344.43) v1@24814.56,13357.56 ; v1@24823.44,13357.56 cw(c24836.57,13344.43) 24836.57,13363 ; R45.1@24830.31,14564.21 cw(c24830.31,14535.74) 24850.44,14555.87 ; R45.1@24830.31,14576 24856.31,14550 24856.31,14445.69 24982,14320 24982,14089 v1(24993,14078) ; R45.1@24841.12,14575.02 ccw(c24864.84,14575.02) R45.1@24848.07,14558.25 ; 24847,13463.55 cw(c24881.45,13463.55) v1@24857.09,13487.91 ; v1@24852.65,13498.63 ccw(c24852.65,13513.79) 24863.37,13503.07 ccw(c24874.09,13492.35) v1@24858.93,13492.35 ; R12.1@24861.04,13355.36 ccw(c24842.6,13336.91) 24842.6,13363 ccw(c24842.6,13389.09) R12.1@24861.04,13370.64 ; R12.1@24861.04,13371.63 ccw(c24842.6,13390.07) 24868.69,13390.07 ccw(c24894.78,13390.07) R12.1@24876.33,13371.63 ; 24982,14119.72 ccw(c25034.72,14119.72) v1@24997.44,14082.44 ; v1@25256.56,13998.56 cw(c25241.01,13983.01) 25263,13983.01 ; v1@25263,13999 25263,13977 25309,13931 25372,13931 25381,13922 P4.1@25381,13877 ; P4.1@25372.38,13885.62 ccw(c25351.58,13906.42) 25381,13906.42 ccw(c25410.42,13906.42) P4.1@25389.62,13885.62 ; 25513,16231 25547,16265 ; 25577.8,16265 cw(c25577.8,16214.31) U9.1@25617.72,16245.56 ; 25588.14,16265 ccw(c25588.14,16293.29) U9.1@25608.15,16273.29 ; U9.1@25605.91,16236.31 ccw(c25547,16190.19) 25547,16265 ; U9.1@25627.9,16265 25547,16265
  Top Layer w20: 25115.5,13530.5 25235,13650 ; 25245,13660 25235,13650 ; 25304.53,13840.53 cw(c25369.19,13775.88) P4.1@25369.19,13867.32 ; 25326.91,13862.91 cw(c25349.5,13840.31) P4.1@25364.61,13868.47 ; 25338.68,13874.68 cw(c25369.19,13844.16) P4.1@25369.19,13887.32 ; 25345.94,13881.94 cw(c25362.8,13865.09) P4.1@25374.07,13886.09 ; P4.1@25362.34,13870.15 ccw(c25345.81,13853.62) 25345.81,13877 ccw(c25345.81,13900.38) P4.1@25362.34,13883.85 ; P4.1@25381,13877 25341,13877 25304,13840 25304,13719 25235,13650
  Top Layer w23.62: v1(23595,16590) 23641,16590 R1.2@23644,16587 ; 23623.45,16590 cw(c23623.45,16567.43) R1.2@23639.4,16583.39 ; R3.2@24162,16469.32 v1@24162,16521 ; U6.14@24307.06,15561.62 24384.62,15561.62 24410,15587 ; v1(24313,15745) 24313,15707 24312,15706 24345.32,15672.68 C42.1@24409,15672.68 ; v1(24317,15852) 24317,15908 24274,15951 R33.1@24220.31,15951 24220.31,15995.31 24380.38,16155.38 24565.93,16155.38 24568.55,16158 v1(24657,16158) ; U6.14@24351.21,15550.23 ccw(c24359.33,15580.07) 24381.2,15558.2 ; U6.14@24357.41,15573.02 ccw(c24371.65,15625.35) 24410,15587 ; U6.14@24362.66,15553.27 cw(c24382.82,15533.11) 24382.82,15561.62 cw(c24382.82,15590.14) U6.14@24362.66,15569.97 ; C39.2@24479,15671.69 24478,15672.68 C42.1@24409,15672.68 ; U1.8@24485.61,16507 24600.69,16507 C6.2@24602,16508.31 ; 24592.16,16507 ccw(c24592.16,16527.17) C6.2@24606.42,16512.91 ; C6.2@24612,16508.31 24613.31,16507 v1(24653,16507) 24657,16503 24724,16503 24752,16475 24752,16458 ; C6.2@24617.58,16512.91 ccw(c24631.84,16527.17) 24631.84,16507 ; v1@24654.39,16508.39 ccw(c24667.41,16521.41) 24667.41,16503 ; TP2.1@24715,14153 24771.37,14153 ; TP2.1@24736.75,14136.07 cw(c24771.37,14109.13) 24771.37,14153 ; TP2.1@24736.75,14169.93 ccw(c24771.37,14196.87) 24771.37,14153 ; R23.1@24795.69,14085 v1(24795.69,14128.69) ; v1@24796,14129 v1(24795.69,14128.69) ; C47.1@24952,15382.32 R42.2@24952,15446.68 ; v1(25001,16063) 24994,16063 24992,16061 24702,16061 24657,16106 v1(24657,16158) ; P4.1@25369.59,13888.41 P4.1@25381,13877 ; P4.1@25381,13887 25483,13887 25514,13918 ; P4.1@25398.38,13871.43 cw(c25435.96,13833.85) 25435.96,13887 ; 25500.33,13904.33 cw(c25531,13873.65) v1@25531,13917.03 ; 25506,13910 cw(c25524.69,13891.31) v1@25530.56,13917.08 ; 25662,15648 25662,15511.09 25724.09,15449 25835,15449 25871,15413 25871,13871 ; 25662,15649 25845,15832 25845,16118 25805,16158 25586,16158 25513,16231 25513,16234 25257,16490 24784,16490 24752,16458 ; C24.1@25833,13849.04 25849.04,13849.04 25871,13871 ; C24.1@25840.2,13860.01 ccw(c25844.01,13897.99) 25871,13871 ; TP4.1@25851.51,14722.51 cw(c25804.47,14675.47) 25871,14675.47 cw(c25937.53,14675.47) TP4.1@25890.49,14722.51 ; TP4.1@25851.51,14761.49 ccw(c25804.47,14808.53) 25871,14808.53 ccw(c25937.53,14808.53) TP4.1@25890.49,14761.49 ; 25871,14870.28 cw(c25916.72,14870.28) v1@25884.39,14902.61 ; 25871,14937.72 ccw(c25916.72,14937.72) v1@25884.39,14905.39 ; C42.1@24409,15672.68 24409,15588 24410,15587 ; v1(24657,16158) 24752,16253 24752,16458 ; 24771.37,14153 v1(24795.69,14128.69)
  Top Layer w39.37: 25514,13918 25667.11,13918 U4.3@25728,13857.11 25824.93,13857.11 C24.1@25833,13849.04 ; 25799.81,13857.11 cw(c25799.81,13821.95) C24.1@25824.67,13846.81
  Bottom Layer w10: P3.1@23619,14498 23627.76,14506.76 23945.76,14506.76 24140.09,14701.09 24140.09,14709.1 24151.78,14720.79 24151.78,15588.78 24308,15745 v1(24313,15745) ; P3.1@23634.12,14494.69 cw(c23663.28,14465.53) 23663.28,14506.76 ; P3.1@23641.19,14487.62 cw(c23687.42,14441.39) 23687.42,14506.76 ; 24289.48,15726.48 cw(c24313,15702.95) v1@24313,15736.22 ; R41.1@24868.61,13833.72 ccw(c24848.34,13853.99) 24877,13853.99 ; 24877,13858.89 ccw(c24912.59,13858.89) R41.1@24887.43,13833.72 ; R41.1@24879,13839.31 24877,13841.31 24877,13874 24887,13884 24966,13884 25035.93,13814.07 U7.5@25111.51,13814.07 ; U7.17@25300.51,13873.13 25368.13,13873.13 25386,13891 ; 25406.34,13891 ccw(c25406.34,13920.11) C45.2@25429.4,13902.33 ; C45.2@25421.48,13908.44 cw(c25386,13935.8) 25386,13891 ; C45.2@25433.74,13891 ccw(c25433.74,13968.59) C46.1@25488.61,13913.73 ; C45.2@25436.41,13902.56 ccw(c25462.83,13926.96) 25462.83,13891 ; C45.2@25443.76,13909.34 ccw(c25485.68,13948.08) C46.1@25485.68,13891 ; 25457.88,13891 ccw(c25457.88,13944.45) C46.1@25495.68,13906.65 ; C46.1@25482.03,13891 ccw(c25482.03,13920.31) C46.1@25502.75,13899.58 ; C46.1@25510.46,13896.11 cw(c25527.31,13882.9) 25527.31,13904.32 ; C46.1@25510.46,13912.52 ccw(c25527.31,13925.73) 25527.31,13904.32 ; v1(25531,13919) 25531,13908 25527.32,13904.32 ; v1@25601.79,13903.79 cw(c25586.8,13888.8) 25608,13888.8 cw(c25629.2,13888.8) v1@25614.21,13903.79 ; v1(25608,13910) 25608,13775 25647,13736 IE.2@25797.13,13736 ; IR.3@25682.19,13122.8 ccw(c25652.58,13094.88) 25652.58,13135.58 ; IR.3@25682.19,13148.36 cw(c25652.58,13176.28) 25652.58,13135.58 ; IE.2@25695.38,13722.83 ccw(c25663.6,13691.04) 25663.6,13736 ccw(c25663.6,13780.96) IE.2@25695.38,13749.17 ; IR.3@25796.13,13135.58 25652.58,13135.58 ; R47.2@25873.27,12905.59 ccw(c25850.56,12882.87) 25850.56,12915 ccw(c25850.56,12947.13) R47.2@25873.27,12924.41 ; R47.2@25882.68,12915 25760,12915 25668.37,13006.63 25641,13034 25641,13124 25652.58,13135.58 ; 25386,13891 C46.1@25485.68,13891 ; C46.1@25485.68,13891 C46.1@25499,13904.32 25527.32,13904.32
  Bottom Layer w15: v1(24795.69,14128.69) 24942.31,14128.69 v1(24993,14078) 24997,14078 25060.28,14014.72 25249.28,14014.72 v1(25261,14003) ; v1@24800.13,14124.25 cw(c24810.85,14113.53) 24810.85,14128.69 cw(c24810.85,14143.85) v1@24800.13,14133.13 ; v1@24814.56,13357.56 cw(c24803.84,13346.84) 24819,13346.84 cw(c24834.16,13346.84) v1@24823.44,13357.56 ; v1(24819,13362) 24819,13275 24700.28,13156.28 24700.28,13147.87 24675,13122.59 24675,13052 24692,13035 24741,13035 24842,13136 25040,13136 25061,13115 25061,12865 25083,12843 ; v1@24986.72,14078 ccw(c24971.56,14078) 24982.28,14088.72 ccw(c24993,14099.44) v1@24993,14084.28 ; v1@24993,14071.72 cw(c24993,14046.9) 25010.55,14064.45 ; 25098,12828 25083,12843 ; 25217.54,14014.72 cw(c25217.54,13959.54) v1@25256.56,13998.56 ; 25668.37,13006.63 25668.37,13004.37 25463,12799 25127,12799 25083,12843
  Bottom Layer w20: 24838,13536.84 ccw(c24897.14,13536.84) v1@24855.32,13495.02 ; v1(24852.65,13492.35) 24838,13507 24838,13624 24822,13640 24822,13827 24834.31,13839.31 ; R41.1@24871.12,13819.69 ccw(c24834.32,13795) 24834.32,13839.31 ; R41.1@24879,13839.31 24834.31,13839.31
  Bottom Layer w23.62: v1(23595,16590) 24095,16590 v1(24163,16522) 24638,16522 v1(24653,16507) ; v1(24313,15745) 24313,15848 v1(24317,15852) ; 24313,15837.59 cw(c24331.41,15837.59) v1@24318.39,15850.61 ; 24612.03,16522 cw(c24612.03,16466.03) v1@24651.61,16505.61 ; v1(24953,15415) 24998,15460 v1@24998,16061 ; LeiDa.1@25743.27,14902.15 25745.12,14904 v1(25883,14904) ; LeiDa.1@25837.42,14896.58 cw(c25855.34,14878.66) 25855.34,14904
+5V: C8.1 C10.1 C16.1 C18.1 C19.1 C20.1 L3.2 R14.2 TP4.1@24981,14613 U2.1 U2.5 | length 2156.4
  Top Layer w23.62: C18.1@25352,15140.68 25580.32,15140.68 25623,15098 25623,14887.68 ; C20.1@25493.95,14817.26 ccw(c25497.16,14836.56) C20.1@25511,14822.72 ; C20.1@25497.82,14840.56 ccw(c25506.41,14892.27) 25543.48,14855.2 ; C20.1@25499.92,14811.65 25575.96,14887.68 ; C20.1@25501.69,14863.86 ccw(c25515.67,14947.97) 25575.96,14887.68 ; C19.1@25717,14887.68 25623,14887.68 ; 25575.96,14887.68 25623,14887.68
  Top Layer w59.06: 24938,14496 24938,14575 25059,14696 25410,14696 25499.92,14785.92 C20.1@25499.92,14811.65
  Bottom Layer w23.62: C16.1@25064.68,14515 25064.68,14463.32 25076,14452 25076.56,14452.56 U2.5@25111.53,14452.56 ; 25067.38,14443.38 cw(c25090.08,14420.67) U2.5@25093.81,14452.56 ; 25067.94,14443.94 cw(c25089.5,14422.38) U2.5@25093.81,14452.56 ; 25073.87,14454.13 ccw(c25084.76,14465.02) U2.5@25093.81,14452.56
  Bottom Layer w59.06: 24938,14243 v1@24938,14566
  other v1: 24938,14480 25022,14502 24938,14513 25023,14536 24938,14546 24938,14579
AD_BAT: C41.2 R30.2 U7.13 | length 512.5
  Top Layer w10: v1@25222.79,13977.21 ccw(c25207.8,13992.2) 25229,13992.2 ccw(c25250.2,13992.2) v1@25235.21,13977.21 ; v1(25229,13971) 25229,14063.68 R30.2@25243,14077.68 25307,14077.68 C41.2@25308,14078.69 ; 25229,14014.13 cw(c25305.56,14014.13) R30.2@25251.43,14068.27 ; 25229,14038.28 cw(c25281.42,14038.28) R30.2@25244.35,14075.35 ; R30.2@25229,14062.42 cw(c25257.28,14062.42) R30.2@25237.28,14082.42 ; R30.2@25253.39,14068.27 cw(c25276.11,14045.56) 25276.11,14077.68 cw(c25276.11,14109.81) R30.2@25253.39,14087.09 ; 25272.47,14077.68 ccw(c25272.47,14113.23) C41.2@25297.61,14088.1 ; 25277.31,14077.68 cw(c25277.31,14048.98) C41.2@25297.61,14069.28
  Bottom Layer w10: U7.13@25215.86,13898.72 25215.86,13959.86 v1@25227,13971
AD_I_SHUNT: C43.1 R35.1 U7.7 | length 405.8
  Bottom Layer w10: C43.1@24920.91,14000.61 cw(c24900.61,13980.31) 24929.31,13980.31 ; 24929.31,13972.11 ccw(c24961.44,13972.11) R35.1@24938.72,13949.39 ; 24929.31,13975.47 cw(c24964.86,13975.47) C43.1@24939.73,14000.61 ; C43.1@24930.32,14011 24929.31,14010 R35.1@24929.31,13939 24957,13939 ; R35.1@24939.71,13930.69 cw(c24957,13916.86) 24957,13939 ; R35.1@24939.71,13947.31 ccw(c24957,13961.14) 24957,13939 ; U7.7@25111.51,13853.44 25086.44,13853.44 25086,13853 25043,13853 24957,13939
AD_NTC: C26.2 R20.2 U7.14 | length 657
  Top Layer w10: v1@25351.79,14021.21 ccw(c25336.8,14036.2) 25358,14036.2 ccw(c25379.2,14036.2) v1@25364.21,14021.21 ; v1(25358,14015) 25358,14056 25370.31,14068.31 C26.2@25426,14068.31 25427,14069.32 R20.2@25497,14069.32 ; C26.2@25415.61,14058.9 ccw(c25392.89,14036.19) 25392.89,14068.31 ccw(c25392.89,14100.44) C26.2@25415.61,14077.72 ; C26.2@25436.39,14058.9 cw(c25461.53,14033.77) 25461.53,14069.32 ; C26.2@25436.39,14077.72 ccw(c25456.69,14098.02) 25456.69,14069.32 ; R20.2@25486.61,14059.91 ccw(c25463.89,14037.19) 25463.89,14069.32 ccw(c25463.89,14101.44) R20.2@25486.61,14078.73
  Bottom Layer w10: U7.14@25235.54,13898.72 25235.54,13936.54 25269,13970 25329,13970 25358,13999 ; 25337,13978 ccw(c25306.51,14008.49) v1@25349.29,14013.9 ; 25351.43,13992.43 ccw(c25332.14,14011.73) v1@25359.21,14015.15 ; v1@25353.28,14007.59 cw(c25347.81,13999) 25358,13999 ; v1(25358,14015) 25358,13999 ; v1@25362.72,14007.59 ccw(c25368.19,13999) 25358,13999
BAT+: C28.2 C36.2 C37.2 D2.1 D4.2 D6.2 D7.2 DCT.2 DCT.3 FB1.2 M1.2 M1.4 M2.1 M2.3 Q4.2 R26.2 R27.1 S1.2 | length 10713.7
  Top Layer w10: v1@24535.79,12978.21 ccw(c24520.8,12993.2) 24542,12993.2 ccw(c24563.2,12993.2) v1@24548.21,12978.21 ; v1(24542,12972) 24542,13468 24577,13503 24795,13503 24829,13537 25086,13537 25278,13729 25278,13851 25202,13927 25202,13995.87 25185,14012.87 25185,14015 25143,14015 25116,14042 R27.1@25116,14077.69 ; R27.1@25106.59,14068.28 cw(c25083.87,14045.56) 25116,14045.56 cw(c25148.13,14045.56) R27.1@25125.41,14068.28
  Top Layer w15: R26.2@24222.37,13992.04 ccw(c24203.93,13973.59) 24203.93,13999.68 ccw(c24203.93,14025.77) R26.2@24222.37,14007.33 ; v1@24229.56,14135.56 ccw(c24218.84,14124.84) 24218.84,14140 ccw(c24218.84,14155.16) v1@24229.56,14144.44 ; v1(24234,14140) 24193,14140 24183,14130 24185,14128 24185,14003 24188.32,13999.68 R26.2@24231,13999.68 24240.57,13990.12 Q4.2@24303.69,13990.12 ; R26.2@24239.63,14007.33 ccw(c24281.17,14048.87) 24281.17,13990.12
  Top Layer w78.74: S1.2@24453.39,15984 24892,15984 25156,15720 25156,15658 ; FB1.2@25147.08,15661.92 ccw(c25125.56,15683.44) 25156,15683.44 ; FB1.2@25147.08,15677.97 cw(c25125.56,15656.45) 25156,15656.45
  Bottom Layer w39.37: 24577,12950 24830,12950 24890.53,13010.53 D2.1@24890.53,13070.83
  Bottom Layer w59.06: 23619,13233 23628,13224 DCT.2@23986.87,13224 24117,13224 ; 23619,14152 23625,14146 M1.2@23990.87,14146 24284.07,14146 D7.2@24289,14150.94 ; 23681,13579 M2.1@23994.87,13579 24135,13579 ; DCT.2@24072.3,13219.01 ccw(c24091.52,13249.48) 24117,13224 ; DCT.2@24075.45,13218.09 ccw(c24075.45,13304.15) 24136.3,13243.3 ; M2.1@24083.4,13584.91 cw(c24084.28,13476.74) 24160.77,13553.23 ; M2.1@24083.45,13584.91 cw(c24083.45,13474.7) 24161.37,13552.63 ; 24100.01,13207.01 cw(c24148.33,13158.68) C28.2@24187.76,13214.51 ; 24109.73,14146 cw(c24109.73,14059.87) C36.2@24170.63,14120.77 ; C28.2@24163.94,13224 cw(c24163.94,13189.08) C28.2@24188.63,13213.77 ; C36.2@24173.37,14120.77 cw(c24234.27,14059.87) v1@24234.27,14146 ; C28.2@24175.04,13224 24117,13224 ; C28.2@24190.32,13210.92 ccw(c24140.94,13196.49) 24140.94,13247.94 ; C28.2@24191.37,13213.77 cw(c24273.85,13131.29) D4.2@24273.85,13247.94 ; C37.2@24192,13585.96 24185.04,13579 24135,13579 ; v1@24238.19,14146 cw(c24238.19,14070.48) D7.2@24291.59,14123.88 ; D4.2@24294,13247.94 24140.94,13247.94 ; D6.2@24324,13528.06 24185.94,13528.06 24135,13579 ; 24117,13224 24140.94,13247.94
  Bottom Layer w78.74: 23619,13096 23619,13068 23689,12998 24129,12998 24177,12950 24577,12950
  Bottom Layer w118.11: 23619,13096 23619,13233
  Bottom Layer w157.48: 23619,14152 23804,14337 23875,14337
  Bottom Layer w196.85: 23645,13237 23645,14156 ; 23996.34,14395.34 24251.52,14650.52 24251.52,14662.95 24263.2,14674.63 24263.2,15524.9 24453.39,15715.09 S1.2@24453.39,15984
BAT_IN+: BAT.3 BAT.4 C30.2 C31.1 C38.1 S1.1 U5.5 | length 4740.3
  Top Layer w39.37: S1.1@25221.1,15984 S1.1@25237,15968.1
  Top Layer w78.74: 25378,13493 25379,13494 25805,13494 25964,13653 25964,13881 ; C30.2@25414.09,13489.21 cw(c25425.66,13477.64) 25425.66,13494 ; 25430.34,13494 cw(c25430.34,13477.64) C30.2@25441.91,13489.21 ; C31.1@25481.09,13490.21 cw(c25490.24,13481.06) 25490.24,13494 ; 25499.76,13494 cw(c25499.76,13481.06) C31.1@25508.91,13490.21 ; 25964,13733 25964,13881 ; v1@25964,14983 25964,13881
  Top Layer w98.43: S1.1@25225.24,15914.19 cw(c25194.96,15848.82) 25267,15848.82 ; S1.1@25228.06,15912.22 cw(c25134.07,15818.22) 25267,15818.22 ; S1.1@25237,15968.1 25267,15938.1 25267,15686 25409.22,15543.78 25432.78,15543.78 C38.1@25450.92,15525.65
  Bottom Layer w78.74: BAT.3@25606.77,15245.83 25880,15245.83 25965,15160.83 v1(25965,14988) ; 25936.76,15189.08 cw(c25858.9,15111.22) BAT.4@25968.84,15105.06 ; BAT.4@25950.34,15103.05 ccw(c25914.96,15138.44) BAT.4@25965,15138.44 ; BAT.4@25950.34,15116.97 cw(c25914.96,15081.59) BAT.4@25965,15081.59
  Bottom Layer w118.11: 25418,15245.83 BAT.3@25606.77,15245.83
  Bottom Layer w196.85: S1.1@25221.1,15984 25221.1,15484 25258.5,15446.6 25258.5,15295.5 25308.17,15245.83 25418,15245.83
CHARG_EN: U5.7 U7.26 | length 373.4
  Top Layer w10: U5.7@25247.05,13485.41 ccw(c25235.1,13497.36) 25252,13497.36 ccw(c25268.9,13497.36) U5.7@25256.95,13485.41 ; U5.7@25252,13459 25252,13525 25275,13548 v1(25275,13577) ; v1@25268.79,13570.79 cw(c25253.8,13555.8) 25275,13555.8 cw(c25296.2,13555.8) v1@25281.21,13570.79
  Bottom Layer w10: 25255.22,13602.22 25255.22,13614 ; U7.26@25255.22,13709.75 25255.22,13614 ; v1@25266.22,13577 ccw(c25245.02,13577) 25260.01,13591.99 ccw(c25275,13606.98) v1@25275,13585.78 ; v1(25275,13577) 25255.22,13596.78 25255.22,13614
CHRG_STATE: U5.8 U7.27 | length 368.3
  Top Layer w10: U5.8@25197.05,13485.41 ccw(c25185.1,13497.36) 25202,13497.36 ccw(c25218.9,13497.36) U5.8@25206.95,13485.41 ; U5.8@25202,13459 25202,13513 25238,13549 v1(25238,13573) ; v1@25231.79,13566.79 cw(c25216.8,13551.8) 25238,13551.8 cw(c25259.2,13551.8) v1@25244.21,13566.79
  Bottom Layer w10: v1@25231.79,13579.21 ccw(c25222.78,13588.22) 25235.53,13588.22 ; 25235.53,13600.17 ccw(c25265.17,13600.17) v1@25244.21,13579.21 ; 25235.53,13629.53 25235.53,13638 ; U7.27@25235.53,13709.75 25235.53,13638 ; v1(25238,13573) 25235.53,13575.47 25235.53,13638
DCT_CON: R24.1 U7.1 | length 742.1
  Bottom Layer w10: R24.1@24620.31,13366 24773,13366 25009,13602 25009,13683 25061.33,13735.33 U7.1@25111.51,13735.33 ; R24.1@24629.72,13356.59 cw(c24652.44,13333.87) 24652.44,13366 cw(c24652.44,13398.13) R24.1@24629.72,13375.41
FLASH-CS: R42.1 U6.10 U8.1 | length 1373.7
  Top Layer w10: U6.10@24308.39,15274.16 24624.16,15274.16 v1(24649.79,15299.79) ; U6.10@24368.81,15260.99 cw(c24400.6,15229.2) 24400.6,15274.16 cw(c24400.6,15319.11) U6.10@24368.81,15287.33 ; v1@24641.01,15299.79 cw(c24619.82,15299.79) 24634.81,15284.81 cw(c24649.79,15269.82) v1@24649.79,15291.01 ; U8.1@24865.18,15592.01 ccw(c24853.56,15603.64) 24870,15603.64 ccw(c24886.44,15603.64) U8.1@24874.82,15592.01 ; U8.1@24870,15555.7 24870,15618 24887,15635 24919,15635 24952,15602 R42.1@24952,15507.31 ; U8.1@24870,15590.32 cw(c24911.68,15590.32) 24882.21,15619.79 cw(c24918.92,15583.08) 24918.92,15635 ; v1@24875.14,15626.86 cw(c24894.78,15607.22) 24894.78,15635 ; R42.1@24942.59,15516.72 ccw(c24919.87,15539.44) 24952,15539.44 ccw(c24984.13,15539.44) R42.1@24961.41,15516.72
  Bottom Layer w10: v1@24643.58,15306 ccw(c24628.6,15320.99) 24649.79,15320.99 ccw(c24670.99,15320.99) v1@24656,15306 ; v1(24649.79,15299.79) 24649.79,15399.79 v1(24876,15626) ; v1@24867.22,15626 cw(c24846.02,15626) 24861.01,15611.01 cw(c24876,15596.02) v1@24876,15617.22
FLASH-HOLD: U6.1 U8.7 | length 1916.1
  Top Layer w10: U6.1@23743.62,14994.12 cw(c23718.55,14969.05) 23754,14969.05 cw(c23789.45,14969.05) U6.1@23764.38,14994.12 ; U6.1@23754,15036 23754,14811 23825,14740 24714,14740 24733.78,14759.78 24733.78,15024.97 24733.5,15025.25 24733.5,15070.51 24774.99,15112 24823,15112 24842,15131 24842,15179 24820,15201 U8.7@24820,15268.3 U8.7@24821,15267.3 ; U8.7@24815.18,15231.99 cw(c24803.56,15220.36) 24820,15220.36 cw(c24836.44,15220.36) U8.7@24824.82,15231.99
FLASH-SCK: U6.2 U8.6 | length 1680.3
  Top Layer w10: U6.2@23798.73,14994.12 cw(c23773.67,14969.05) 23809.12,14969.05 cw(c23844.57,14969.05) U6.2@23819.5,14994.12 ; U6.2@23809.12,15036 23809.12,14844.88 23872.5,14781.5 24656.5,14781.5 24692.78,14817.78 24692.78,15007.99 24692.5,15008.27 24692.5,15087.49 24770,15164.99 U8.6@24770,15268.3 ; U8.6@24765.18,15231.99 cw(c24753.56,15220.36) 24770,15220.36 cw(c24786.44,15220.36) U8.6@24774.82,15231.99
FLASH-SDI: U6.5 U8.5 | length 1400.4
  Top Layer w10: U6.5@23964.09,14994.12 cw(c23939.02,14969.05) 23974.47,14969.05 cw(c24009.93,14969.05) U6.5@23984.86,14994.12 ; U6.5@23974.47,15036 23974.47,14862.53 24013.7,14823.3 24615.31,14823.3 24651.18,14859.17 24651.18,15125.77 24720,15194.59 U8.5@24720,15268.3 ; U8.5@24715.18,15231.99 cw(c24703.56,15220.36) 24720,15220.36 cw(c24736.44,15220.36) U8.5@24724.82,15231.99
FLASH-SDO: TP1.1 U6.16 U8.2 | length 1393.4
  Top Layer w10: U6.16@24019.27,15701.86 ccw(c23994.2,15726.93) 24029.65,15726.93 ccw(c24065.11,15726.93) U6.16@24040.04,15701.86 ; U6.16@24029.65,15659.98 24029.65,15767.65 24080.81,15818.81 24302.42,15818.81 24303.01,15818.22 24375.28,15818.22 24383.15,15826.09 24528.03,15826.09 24557.12,15797 24677,15797 ; TP1.1@24660.02,15759.65 ccw(c24636.6,15795) 24679,15795 ; TP1.1@24665.54,15751.32 ccw(c24648.94,15776.38) 24679,15776.38 ccw(c24709.06,15776.38) TP1.1@24692.46,15751.32 ; TP1.1@24679,15731 24679,15795 ; TP1.1@24697.98,15759.65 cw(c24721.4,15795) 24679,15795 ; U8.2@24815.18,15592.01 ccw(c24803.56,15603.64) 24820,15603.64 ccw(c24836.44,15603.64) U8.2@24824.82,15592.01 ; U8.2@24820,15555.7 24820,15671 24694,15797 24677,15797 ; 24677,15797 24679,15795
FLASH-WP: U6.11 U8.3 | length 882.6
  Top Layer w10: U6.11@24308.39,15345.02 24594.02,15345.02 24663,15414 24663,15617 24681,15635 24692,15646 24693,15645 24755,15645 24770,15630 U8.3@24770,15555.7 ; U6.11@24368.81,15331.86 cw(c24400.6,15300.07) 24400.6,15345.02 cw(c24400.6,15389.98) U6.11@24368.81,15358.19 ; U8.3@24765.18,15592.01 ccw(c24753.56,15603.64) 24770,15603.64 ccw(c24786.44,15603.64) U8.3@24774.82,15592.01